# Altium PCB binbot_board_ver8.PcbDoc
Units mm, origin at the board's own origin, x right, y up, seen from the top; angles counter-clockwise.
Board outline 120.96 x 80.85 mm, 2 copper layers (Top Layer, Bottom Layer); 35 components, 0 nets, 183 pads, 50 vias.
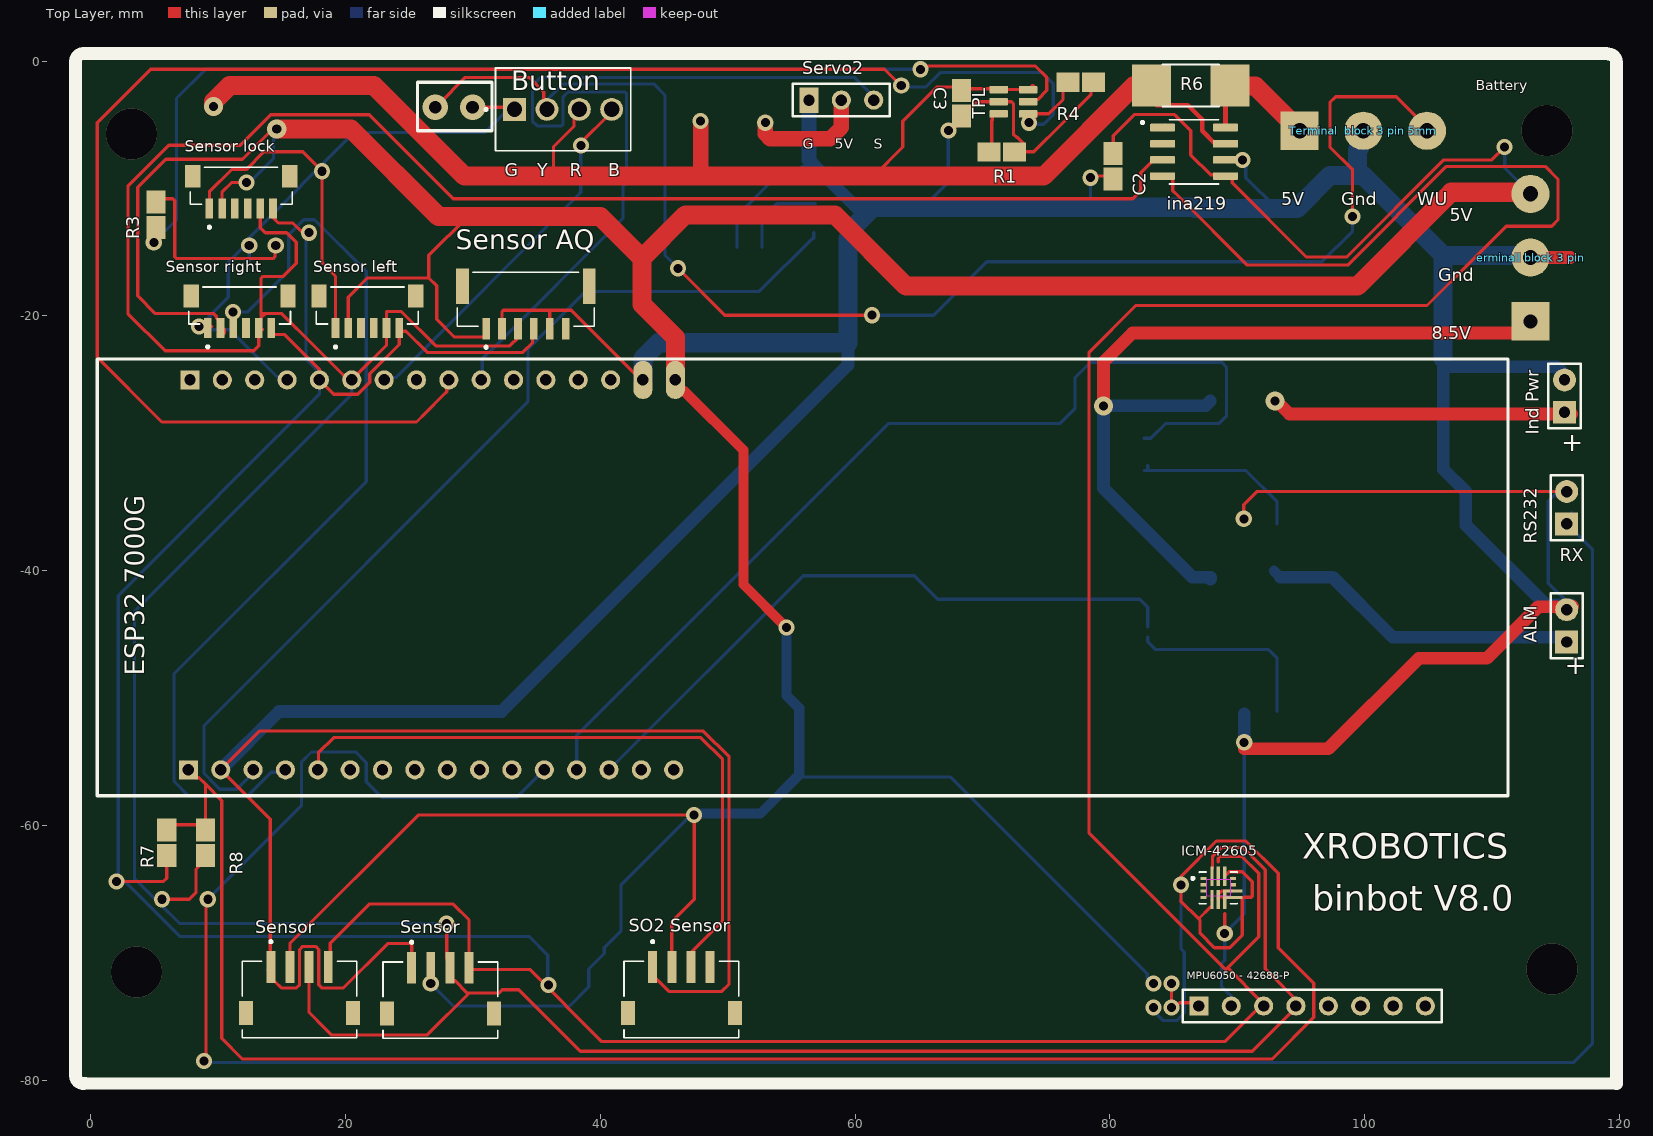
[diagram p0: Top Layer view]
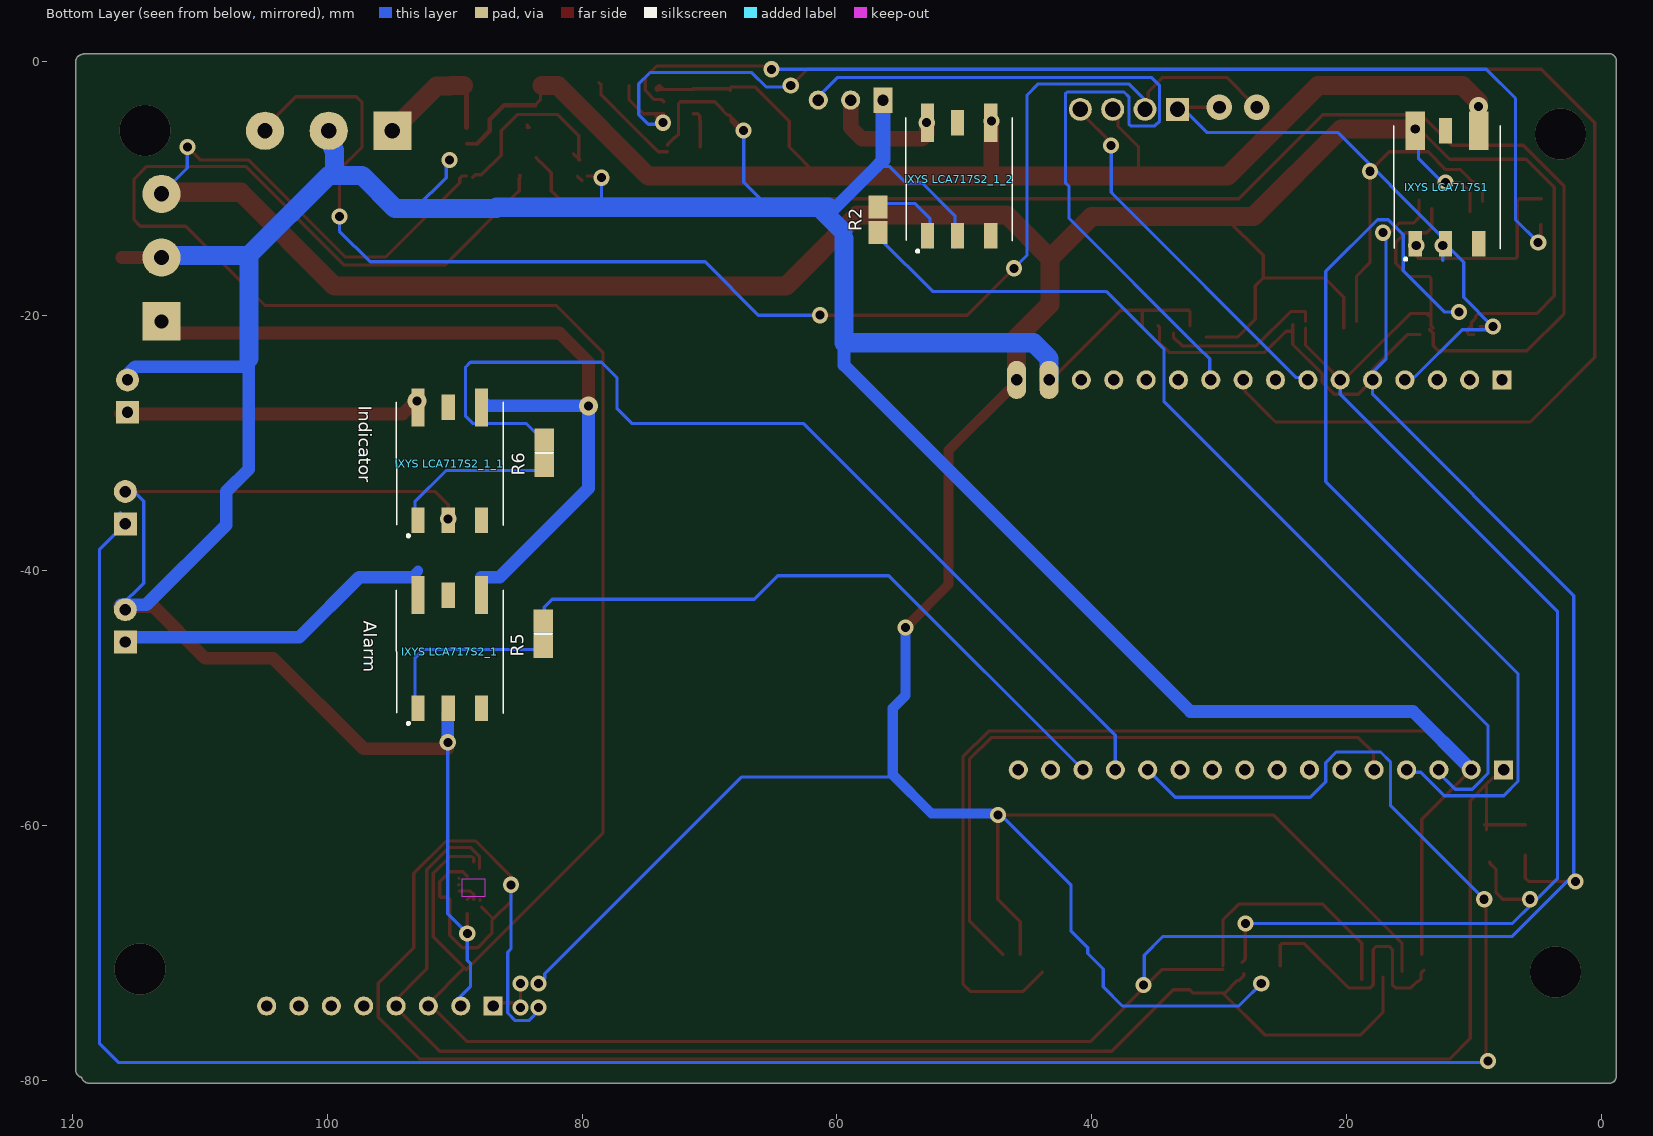
[diagram p1: Bottom Layer view, seen from below]

## Layer stack, top to bottom
Top Solder: solder mask 0.0102, Solder Resist, Dk 3.5
Top Layer: signal copper 0.0356
Dielectric 1: dielectric 0.32, FR-4, Dk 4.8
Bottom Layer: signal copper 0.0356
Bottom Solder: solder mask 0.0102, Solder Resist, Dk 3.5

## Board outline
-0.442,-80.229 cw(c-0.589,-79.647) -1.189,-79.647 -1.189,0 cw(c-0.589,0) -0.589,0.6 118.97,0.6 cw(c118.97,0) 119.231,0.541 cw(c119.172,-0.057) 119.773,-0.057 119.773,-79.175 cw(c119.172,-79.175) 119.304,-79.761 cw(c118.718,-79.629) 118.718,-80.229

## Design rules (kind name [scope] priority, off if disabled: settings)
Clearance [All] p1: gap=0.254 ignorepadtopadclearanceinfootprint=FALSE except(0: Arc-Hole Track-Hole SMDPad-Hole THPad-Hole Via-Hole Fill-Hole Poly-Hole Region-Hole Text-Hole)
PolygonConnect [All] p1: connectstyle=Relief reliefconductorwidth=0.254 reliefentries=4 polygonreliefangle="90 Angle" airgapwidth=0.254
RoutingVias [All] p1: holewidth=0.711 width=1.27 viastyle="Through Hole" minholewidth=0.711 minwidth=1.27 maxholewidth=0.711 maxwidth=1.27
SolderMaskExpansion [All] p1: expansion=0.102 istentingtop=FALSE
Width [All] p1: maxlimit=0.254 minlimit=0.254 preferedwidth=0.254
30 further rules are at their usual default settings.

## Components (designator, comment, footprint, x,y, rotation, side; value= is the part's Value field where it differs from the comment)
ALM "Comment" HDR1X2 115.697,-27.559 r90 top
Button "Terminal Block 4pin 2,5mm" TE_282834-4 37.084,-3.779 r0 top
C2 "100nF" 6-0805_M 80.264,-8.255 r90 top (schematic designator R2)
C3 "0.1μf" 6-0805_M 68.372,-3.302 r90 top
"erminall block 3 pin" "Terminall block 3 pin" TE_282836-3#1 113.03,-15.414 r90 top
"ESP32 7000G" "ESP32 7000G" HDR1X16#1 7.793,-25.019 r0 top
ICM-42605 "ICM-42605" XDCR_ICM-42605 88.519,-64.897 r0 top
ina219 "Comment" SOIC127P599X175-8N 86.614,-7.112 r0 top
"Ind Pwr" "Comment" HDR1X2 115.87,-45.593 r90 top
"IXYS LCA717S1" "IXYS LCA717S" *SON160P500X500X140-6N#1 12.111,-9.897 r90 bottom
"IXYS LCA717S2_1" "IXYS LCA717S" *SON160P500X500X140-6N#2 90.394,-46.346 r90 bottom
"IXYS LCA717S2_1_1" "IXYS LCA717S" *SON160P500X500X140-6N#2 90.394,-31.614 r90 bottom
"IXYS LCA717S2_1_2" "IXYS LCA717S" *SON160P500X500X140-6N#2 50.419,-9.271 r90 bottom
"MPU6050 - 42688-P" "Comment" HDR1X8 86.995,-74.168 r0 top
R1 "180K Ohms" 6-0805_M 71.525,-7.112 r0 top (schematic designator R3)
R2 "4.7K Ohms" 6-0805_M 56.769,-12.446 r90 bottom (schematic designator R3)
R3 "0.5K Ohms" 6-0805_M 5.126,-12.065 r90 top (schematic designator R2)
R4 "180K Ohms" 6-0805_M 77.724,-1.651 r0 top (schematic designator R2)
R5 "0.5K Ohms" 6-0805_M 83.058,-44.958 r90 bottom (schematic designator R3)
R6 "0.01ohm" RESC6331X70N 86.36,-1.905 r0 top
R6 "0.5K Ohms" 6-0805_M 82.977,-30.75 r90 bottom (schematic designator R3)
R7 "10K Ohms" 6-0805_M 5.969,-61.341 r90 top (schematic designator R2)
R8 "10K Ohms" 6-0805_M 9.017,-61.341 r90 top (schematic designator R2)
RS232 "Comment" HDR1X2 115.87,-36.322 r90 top
Sensor "Comment" JST_S4B-ZR-SM4A-TF(LF)(SN) 27.444,-71.161 r0 top
Sensor "Comment" JST_S4B-ZR-SM4A-TF(LF)(SN) 16.395,-71.12 r0 top
"Sensor AQ" "Comment" JST_BM06B-GHS-TBT(LF)(SN)(N) 34.163,-17.653 r180 top
"Sensor left" "TOF0120" JST_BM06B-SRSS-TB(LF)(SN) 21.717,-19.177 r0 top
"Sensor lock" "TOF050C" JST_BM06B-SRSS-TB(LF)(SN) 11.814,-9.782 r0 top
"Sensor right" "TOF0120" JST_BM06B-SRSS-TB(LF)(SN) 11.684,-19.177 r0 top
Servo2 "Comment" HDR1X3 56.388,-3.048 r0 top
"SO2 Sensor" "Comment" JST_S4B-ZR-SM4A-TF(LF)(SN) 46.367,-71.12 r0 top
"Terminal  block 3 pin 5mm" "Terminal 3 pin" TE_282836-3#2 99.902,-5.461 r0 top
TPL "TPL5110" SOT95P280X110-6N 72.436,-3.175 r0 top
? "Comment" HDR1X16#2 7.666,-55.626 r0 top

## Footprints (in the part's own frame and the unit in brackets; to place one, negate y for a bottom-side part, rotate by r counter-clockwise, add the part's x,y. Pads: shape width x height; smd on the part's side, far side on the other; paste and mask are expansions set on the pad)
6-0805_M [mm] "Chip Resistor, Body 2.0x1.2mm, IPC Low Density"
  rect 1.8x1.5 smd: 1(-1,0) 2(1,0)
  body extent -1.07,-0.7 1.07,0.7, height 0.7
*SON160P500X500X140-6N#1 [mm]
  rect 2x1.03 smd: 1(-4.436,2.489) 2(-4.436,0.127) 3(-4.436,-2.489) 5(4.436,0.127)
  rect 3x1.5 smd: 4(4.436,-2.489) 6(4.436,2.489)
  silkscreen extent -5.74,-4.19 4.83,4.19
*SON160P500X500X140-6N#2 [mm]
  rect 2x1.03 smd: 1(-4.436,2.489) 2(-4.436,0.127) 3(-4.436,-2.489) 5(4.436,0.127)
  rect 3x1.03 smd: 4(4.436,-2.489) 6(4.436,2.489)
  silkscreen extent -5.74,-4.19 4.83,4.19
HDR1X2 [mm] "Connector; Header; 2 Position"
  rect 1.8x1.8 hole 0.9: 1(0,0)
  round 1.8 hole 0.9: 2(2.54,0)
  silkscreen extent -1.27,-1.27 3.81,1.27
HDR1X3 [mm] "Connector; Header; 3 Position"
  rect 1.5x2 hole 0.9: 1(0,0)
  round 1.5 hole 0.9: 2(2.54,0) 3(5.08,0)
  silkscreen extent -1.27,-1.27 6.35,1.27
HDR1X8 [mm] "Connector; Header; 8 Position"
  rect 1.5x1.5 hole 0.9: 1(0,0)
  round 1.5 hole 0.9: 2(2.54,0) 3(5.08,0) 4(7.62,0) 5(10.16,0) 6(12.7,0) 7(15.24,0) 8(17.78,0)
  silkscreen extent -1.27,-1.27 19.05,1.27
HDR1X16#1 [mm] "Connector; Header; 16 Position"
  rect 1.5x1.5 hole 0.9: 1(0,0)
  round 1.5 hole 0.9: 2(2.54,0) 3(5.08,0) 4(7.62,0) 5(10.16,0) 6(12.7,0) 7(15.24,0) 8(17.78,0) 9(20.32,0) 10(22.86,0) 11(25.4,0) 12(27.94,0) 13(30.48,0) 14(33.02,0)
  oval 1.5x3 hole 0.9: 15(35.56,0) 16(38.1,0)
HDR1X16#2 [mm] "Connector; Header; 16 Position"
  rect 1.5x1.5 hole 0.9: 1(0,0)
  round 1.5 hole 0.9: 2(2.54,0) 3(5.08,0) 4(7.62,0) 5(10.16,0) 6(12.7,0) 7(15.24,0) 8(17.78,0) 9(20.32,0) 10(22.86,0) 11(25.4,0) 12(27.94,0) 13(30.48,0) 14(33.02,0) 15(35.56,0) 16(38.1,0)
JST_BM06B-GHS-TBT(LF)(SN)(N) [mm]
  rect 0.6x1.7 smd: 1(3.125,3.35) 2(1.875,3.35) 3(0.625,3.35) 4(-0.625,3.35) 5(-1.875,3.35) 6(-3.125,3.35)
  rect 1x2.8 smd: S1(-4.975,0) S2(4.975,0)
  silkscreen extent -5.38,-1.1 5.38,4.9, body extent -5.38,-2.12 5.38,2.83, height 4.15
JST_BM06B-SRSS-TB(LF)(SN) [mm]
  rect 0.6x1.55 smd: 1(-2.5,-1.775) 2(-1.5,-1.775) 3(-0.5,-1.775) 4(0.5,-1.775) 5(1.5,-1.775) 6(2.5,-1.775)
  rect 1.2x1.8 smd: S1(-3.8,0.75) S2(3.8,0.75)
  silkscreen extent -4,-3.35 4,1.45, body extent -4,-2.9 4,0.7, height 4.25
JST_S4B-ZR-SM4A-TF(LF)(SN) [mm]
  rect 0.7x2.5 smd: 1(-2.25,0) 2(-0.75,0) 3(0.75,0) 4(2.25,0)
  rect 1.1x1.9 smd: S1(-4.2,-3.6) S2(4.2,-3.6)
  silkscreen extent -4.5,-5.55 4.5,2.1
RESC6331X70N [mm]
  rect 3.06x3.32 smd: 1(-3.078,0) 2(3.078,0)
  silkscreen extent -2.23,-1.65 2.23,1.65
SOIC127P599X175-8N [mm]
  rrect25% 1.97x0.6 smd: 1(-2.47,1.905) 2(-2.47,0.635) 3(-2.47,-0.635) 4(-2.47,-1.905) 5(2.47,-1.905) 6(2.47,-0.635) 7(2.47,0.635) 8(2.47,1.905)
  silkscreen extent -4.14,-2.52 1.95,2.52, body extent -2.45,-3 2.45,3, height 1.75
SOT95P280X110-6N [mm]
  rrect25% 1.45x0.59 smd: 1(-1.155,0.95) 2(-1.155,0) 3(-1.155,-0.95) 4(1.155,-0.95) 5(1.155,0) 6(1.155,0.95)
TE_282834-4 [mm]
  rect 1.8x1.8 / inner round 1.8 / far side rect 1.8x1.8 hole 1.2: 1(-3.81,0)
  round 1.8 hole 1.2: 2(-1.27,0) 3(1.27,0) 4(3.81,0)
  silkscreen extent -6.16,-3.25 5.31,3.25, body extent -5.31,-3.25 5.31,3.25, height 10
TE_282836-3#1 [mm]
  rect 3x3 hole 1.1: 1(-5,0)
  round 3 hole 1.2: 2(0,0) 3(5,0)
TE_282836-3#2 [mm]
  rect 3x3 hole 1.2: 1(-5,0)
  round 3 hole 1.2: 2(0,0) 3(5,0)
XDCR_ICM-42605 [mm]
  rect 0.475x0.25 smd paste-1 mask+0.05: 1(-1.162,0.75) 2(-1.162,0.25) 3(-1.162,-0.25) 4(-1.162,-0.75) 10(1.162,0.25) 11(1.162,0.75)
  rect 0.25x1.5 smd paste-1 mask+0.05: 5(-0.5,-0.913) 6(0,-0.913) 7(0.5,-0.913) 12(0.5,0.913) 13(0,0.913) 14(-0.5,0.913)
  rect 1.5x0.25 smd paste-1 mask+0.05: 8(1.162,-0.75) 9(1.162,-0.25)
  Keep-Out Layer region: 0.925,-0.675 -0.925,-0.675 -0.925,0.675 0.925,0.675
  silkscreen extent -2.1,-1.25 1.5,1.25, body extent -1.5,-1.25 1.5,1.25, height 0.97

## Via types
v1: diameter 1.27, hole 0.711, Top Layer to Bottom Layer, 39 vias
v2: diameter 1.5, hole 0.711, Top Layer to Bottom Layer, 5 vias
v3: diameter 4, hole 4, Top Layer to Bottom Layer, 4 vias
v4: diameter 2, hole 1, Top Layer to Bottom Layer, 2 vias

## Nets (pads, with @x,y where several pads share a name; then routed paths per layer and width w, separated by ;. In a path a pad name is that pad's centre, name@x,y a point inside that pad or via, vN(x,y) a via of type N, cw(c..) or ccw(c..) an arc to the next point about the centre after c; other vN are vias at no path point)
pads on no net: "erminall block 3 pin.1" "erminall block 3 pin.2" "erminall block 3 pin.3" "ESP32 7000G.1" "ESP32 7000G.2" "ESP32 7000G.3" "ESP32 7000G.4" "ESP32 7000G.5" "ESP32 7000G.6" "ESP32 7000G.7" "ESP32 7000G.8" "ESP32 7000G.9" "ESP32 7000G.10" "ESP32 7000G.11" "ESP32 7000G.12" "ESP32 7000G.13" "ESP32 7000G.14" "ESP32 7000G.15" "ESP32 7000G.16" "Ind Pwr.1" "Ind Pwr.2" "IXYS LCA717S1.1" "IXYS LCA717S1.2" "IXYS LCA717S1.3" "IXYS LCA717S1.4" "IXYS LCA717S1.5" "IXYS LCA717S1.6" "IXYS LCA717S2_1.1" "IXYS LCA717S2_1.2" "IXYS LCA717S2_1.3" "IXYS LCA717S2_1.4" "IXYS LCA717S2_1.5" "IXYS LCA717S2_1.6" "IXYS LCA717S2_1_1.1" "IXYS LCA717S2_1_1.2" "IXYS LCA717S2_1_1.3" "IXYS LCA717S2_1_1.4" "IXYS LCA717S2_1_1.5" "IXYS LCA717S2_1_1.6" "IXYS LCA717S2_1_2.1" "IXYS LCA717S2_1_2.2" "IXYS LCA717S2_1_2.3" "IXYS LCA717S2_1_2.4" "IXYS LCA717S2_1_2.5" "IXYS LCA717S2_1_2.6" "MPU6050 - 42688-P.1" "MPU6050 - 42688-P.2" "MPU6050 - 42688-P.3" "MPU6050 - 42688-P.4" "MPU6050 - 42688-P.5" "MPU6050 - 42688-P.6" "MPU6050 - 42688-P.7" "MPU6050 - 42688-P.8" "Sensor AQ.1" "Sensor AQ.2" "Sensor AQ.3" "Sensor AQ.4" "Sensor AQ.5" "Sensor AQ.6" "Sensor AQ.S1" "Sensor AQ.S2" "Sensor left.1" "Sensor left.2" "Sensor left.3" "Sensor left.4" "Sensor left.5" "Sensor left.6" "Sensor left.S1" "Sensor left.S2" "Sensor lock.1" "Sensor lock.2" "Sensor lock.3" "Sensor lock.4" "Sensor lock.5" "Sensor lock.6" "Sensor lock.S1" "Sensor lock.S2" "Sensor right.1" "Sensor right.2" "Sensor right.3" "Sensor right.4" "Sensor right.5" "Sensor right.6" "Sensor right.S1" "Sensor right.S2" "SO2 Sensor.1" "SO2 Sensor.2" "SO2 Sensor.3" "SO2 Sensor.4" "SO2 Sensor.S1" "SO2 Sensor.S2" "Terminal  block 3 pin 5mm.1" "Terminal  block 3 pin 5mm.2" "Terminal  block 3 pin 5mm.3" ?.1 ?.2 ?.3 ?.4 ?.5 ?.6 ?.7 ?.8 ?.9 ?.10 ?.11 ?.12 ?.13 ?.14 ?.15 ?.16 ALM.1 ALM.2 Button.1 Button.2 Button.3 Button.4 C2.1 C2.2 C3.1 C3.2 ICM-42605.1 ICM-42605.2 ICM-42605.3 ICM-42605.4 ICM-42605.5 ICM-42605.6 ICM-42605.7 ICM-42605.8 ICM-42605.9 ICM-42605.10 ICM-42605.11 ICM-42605.12 ICM-42605.13 ICM-42605.14 ina219.1 ina219.2 ina219.3 ina219.4 ina219.5 ina219.6 ina219.7 ina219.8 R1.1 R1.2 R2.1 R2.2 R3.1 R3.2 R4.1 R4.2 R5.1 R5.2 R6.1 R6.2 R7.1 R7.2 R8.1 R8.2 RS232.1 RS232.2 Sensor.1 Sensor.2 Sensor.3 Sensor.4 Sensor.S1 Sensor.S2 Servo2.1 Servo2.2 Servo2.3 TPL.1 TPL.2 TPL.3 TPL.4 TPL.5 TPL.6
copper on no net: | length 3089.7
  Top Layer w0.254: v1(2.032,-64.389) 5.715,-64.389 5.969,-64.135 5.969,-62.341 ; 4.711,-10.795 6.455,-10.795 6.604,-10.944 6.604,-15.345 6.753,-15.494 14.314,-15.494 14.463,-15.345 14.463,-14.54 v1(14.524,-14.478) ; v1@4.745,-14.351 4.745,-12.827 ; v1(5.588,-65.786) 7.747,-65.786 8.255,-65.278 8.255,-63.453 8.763,-62.945 8.763,-62.865 ; 5.969,-59.944 9.144,-59.944 ; 7.239,-55.626 7.239,-54.991 ; v1(8.509,-20.828) 9.503,-20.828 ; v1(8.89,-78.486) 9.04,-78.336 9.04,-65.936 v1(9.19,-65.786) ; 9.017,-60.341 9.017,-59.944 9.017,-56.769 ; 9.314,-11.006 9.314,-10.244 11.049,-8.509 12.192,-8.509 13.589,-7.112 16.637,-7.112 v1(18.161,-8.636) 18.161,-15.835 19.217,-16.891 19.217,-20.407 ; 10.011,-21.46 10.394,-21.46 10.503,-21.351 10.503,-21.034 10.184,-20.715 10.184,-20.952 10.184,-20.477 9.865,-20.158 9.865,-20.019 9.658,-19.812 5.08,-19.812 3.683,-18.415 3.683,-15.956 3.683,-9.906 5.899,-7.69 11.912,-7.69 14.268,-5.334 v2(14.605,-5.334) ; 10.314,-11.811 10.314,-10.263 11.052,-9.525 v1(12.238,-9.525) ; v1(12.446,-14.478) v1@12.446,-14.219 ; 12.746,-55.626 12.954,-55.834 ; 13.184,-20.952 13.357,-20.779 13.357,-20.155 13.44,-20.072 13.647,-19.865 13.716,-19.796 ; 13.314,-11.557 13.314,-11.811 13.314,-13.06 13.716,-13.462 15.372,-13.462 16.129,-14.219 16.129,-15.875 15.113,-16.891 13.519,-16.891 13.37,-17.04 13.37,-20.003 13.577,-19.796 13.716,-19.796 ; 13.487,-21.048 13.184,-21.351 13.184,-22.352 12.801,-22.735 11.8,-22.735 5.845,-22.735 2.921,-19.812 2.921,-9.823 6.14,-6.604 11.736,-6.604 13.653,-4.687 14.137,-4.203 21.856,-4.203 28.448,-10.795 81.788,-10.795 82.423,-10.16 82.423,-8.763 83.266,-7.92 83.286,-7.92 83.61,-7.596 83.61,-7.576 ; 13.922,-71.348 14.145,-71.571 14.145,-71.93 14.145,-72.02 14.368,-72.243 14.458,-72.243 14.966,-72.751 16.153,-72.751 16.395,-72.509 16.395,-69.731 16.637,-69.489 17.653,-69.489 17.895,-69.731 17.895,-72.509 18.137,-72.751 19.843,-72.751 23.34,-69.254 25.045,-69.254 25.194,-69.403 25.194,-71.034 ; 14.097,-70.104 14.097,-59.517 10.206,-55.626 13.245,-52.587 48.099,-52.587 50.114,-54.603 50.114,-72.441 49.53,-73.025 45.387,-73.025 43.873,-71.511 ; 14.184,-21.463 15.24,-21.463 17.953,-24.176 17.953,-25.019 ; 14.314,-10.922 14.314,-12.282 14.732,-12.7 15.875,-12.7 v1@16.637,-13.462 ; 15.645,-71.445 15.645,-69.235 25.698,-59.182 v1(47.371,-59.182) 47.371,-65.786 45.611,-67.546 45.611,-70.104 ; 15.667,-55.626 15.667,-55.507 ; 17.145,-71.882 17.145,-72.898 17.145,-74.676 18.415,-75.946 18.923,-76.454 26.416,-76.454 26.416,-76.43 29.694,-73.152 ; 17.743,-24.808 19.084,-26.15 20.962,-26.15 21.902,-25.209 21.902,-24.551 24.217,-22.236 24.217,-20.952 ; 17.873,-55.758 17.873,-54.294 19.072,-53.095 47.888,-53.095 49.606,-54.813 49.606,-67.476 46.984,-70.098 ; 18.796,-72.075 18.796,-69.235 21.864,-66.167 28.448,-66.167 29.694,-67.413 29.694,-71.034 ; 20.193,-20.447 20.239,-20.401 ; 20.217,-20.952 20.217,-18.518 21.717,-17.018 26.543,-17.018 ; 23.217,-20.952 23.217,-22.295 20.493,-25.019 20.193,-25.019 19.454,-24.28 17.526,-22.352 14.97,-19.796 13.716,-19.796 ; 23.217,-20.423 23.217,-19.645 24.39,-19.645 27.097,-22.352 32.893,-22.352 33.592,-21.653 33.592,-21.336 ; 24.217,-20.661 24.217,-21.02 24.39,-21.193 24.749,-21.193 26.416,-22.86 33.909,-22.86 34.687,-22.082 34.687,-20.876 34.788,-20.775 ; v4@27.305,-3.365 29.4,-1.27 34.417,-1.27 35.56,-2.413 35.56,-3.779 ; v1@27.94,-67.945 27.94,-70.485 28.194,-70.739 ; 28.061,-71.64 28.061,-71.801 28.417,-72.157 28.579,-72.157 29.574,-73.152 32.048,-73.152 32.302,-72.898 33.614,-72.898 35.88,-75.164 38.44,-77.724 91.186,-77.724 94.615,-74.295 94.615,-73.914 ; 28.113,-25.019 27.948,-25.184 27.948,-25.946 27.617,-26.277 26.351,-27.543 25.573,-28.321 5.588,-28.321 0.508,-23.241 0.508,-4.826 4.699,-0.635 62.313,-0.635 63.583,-1.905 v1(63.627,-1.905) ; 29.464,-8.636 29.464,-8.382 ; 29.591,-12.192 26.543,-15.24 26.543,-17.018 ; 29.694,-71.3 34.47,-71.3 40.132,-76.962 43.942,-76.962 89.039,-76.962 92.081,-73.92 ; v4(29.972,-3.619) 32.956,-3.619 ; 31.038,-21.653 28.557,-21.653 27.16,-20.256 27.16,-17.635 26.543,-17.018 ; 32.288,-20.775 32.288,-19.655 32.385,-19.558 37.719,-19.558 43.18,-25.019 43.353,-25.019 43.353,-24.765 43.353,-24.606 ; 33.147,-25.019 33.147,-24.511 ; 36.038,-20.775 36.038,-19.558 ; 36.322,-9.017 36.322,-6.731 37.937,-5.116 37.937,-4.566 38.476,-4.027 ; v1(38.476,-6.604) 38.476,-6.401 40.767,-4.109 40.767,-3.779 ; 40.321,-24.781 40.492,-24.781 41.067,-25.356 41.067,-25.527 ; 45.318,-24.443 45.893,-25.019 ; v1(46.101,-16.256) 49.782,-19.937 55.37,-19.937 55.372,-19.939 v1@61.214,-19.939 ; 61.468,-9.017 63.754,-6.731 63.754,-4.699 66.421,-2.032 68.326,-2.032 ; v1@65.405,-0.381 74.168,-0.381 75.057,-1.27 75.057,-2.286 74.336,-3.007 73.759,-3.007 73.591,-3.175 ; v1@67.749,-5.284 68.301,-4.733 68.301,-4.374 ; 67.749,-4.953 68.372,-4.33 68.372,-4.302 ; 68.372,-2.302 68.372,-2.172 68.385,-2.159 71.311,-2.159 ; 68.426,-4.228 68.596,-4.228 68.995,-3.829 68.995,-3.776 69.596,-3.175 71.281,-3.175 72.287,-3.175 72.436,-3.324 72.436,-3.715 72.436,-5.731 72.686,-5.981 72.736,-5.981 73.309,-6.554 73.309,-6.604 ; 70.739,-6.719 70.739,-4.667 70.777,-4.629 70.777,-4.293 70.945,-4.125 71.281,-4.125 ; 71.281,-2.225 73.591,-2.225 ; 72.126,-76.962 72.15,-76.962 ; 73.309,-7.112 74.041,-7.112 76.327,-4.826 78.52,-2.633 78.52,-1.855 78.683,-1.692 ; 73.591,-4.125 74.021,-4.125 74.189,-4.293 74.189,-4.367 ; v1@73.66,-4.953 v1@73.82,-4.953 ; 73.806,-4.125 75.209,-4.125 76.327,-3.007 76.327,-1.905 ; 73.855,-2.225 73.591,-2.225 ; 73.911,-1.905 73.872,-1.944 73.82,-1.997 73.591,-2.225 ; v1(78.486,-9.144) 78.613,-9.017 79.629,-9.017 ; 80.01,-9.382 80.375,-9.017 ; 80.19,-7.747 80.688,-7.249 ; 80.264,-7.747 80.264,-7.382 ; 80.264,-7.255 80.264,-6.905 80.264,-5.842 81.915,-4.191 85.09,-4.191 86.36,-5.461 86.36,-7.366 87.912,-8.918 88.396,-8.918 88.59,-9.111 ; 83.282,-1.905 83.282,-3.035 83.685,-3.438 ; 84.317,-5.034 84.144,-5.207 84.328,-5.207 ; v1@84.836,-72.771 v1(84.836,-74.295) 85.111,-74.295 85.486,-73.92 86.735,-73.92 86.995,-73.66 ; 84.836,-9.017 84.93,-8.923 ; 84.874,-9.12 84.943,-9.19 84.943,-10.16 85.324,-10.541 90.785,-16.002 98.679,-16.002 106.426,-8.255 114.173,-8.255 115.189,-9.271 115.189,-12.446 114.681,-12.954 111.125,-12.954 109.667,-14.412 108.457,-15.622 104.902,-19.177 82.042,-19.177 78.371,-22.848 78.371,-60.591 89.103,-71.323 89.248,-71.179 ; 87.888,-66.417 87.659,-66.646 87.202,-67.103 86.973,-67.332 ; 88.019,-65.858 88.019,-65.81 ; 88.057,-63.361 88.057,-62.438 88.773,-61.722 90.436,-61.722 92.202,-63.488 92.202,-71.247 95.123,-74.168 ; 88.265,-6.477 89.084,-6.477 ; 88.519,-65.81 88.519,-65.401 88.773,-65.147 89.681,-65.147 ; 88.519,-65.605 88.815,-65.605 89.019,-65.81 ; 88.519,-62.861 88.519,-62.571 88.652,-62.438 90.378,-62.438 91.694,-63.754 91.694,-68.733 89.248,-71.179 ; v1(89.019,-68.473) 89.019,-66.933 ; 89.019,-63.984 89.376,-63.627 90.402,-63.627 90.551,-63.776 91.185,-64.41 91.185,-65.557 91.116,-65.626 90.551,-65.626 90.402,-65.775 90.402,-68.602 89.408,-69.596 88.212,-69.596 87.089,-68.473 87.089,-67.448 86.973,-67.332 ; 89.084,-9.017 89.443,-9.017 89.616,-9.19 89.616,-9.549 95.434,-15.367 98.596,-15.367 106.216,-7.747 109.982,-7.747 v1(110.998,-6.731) ; 89.084,-2.259 89.438,-1.905 ; 89.681,-64.647 89.687,-64.653 ; 89.681,-64.147 89.681,-64.139 ; v1(90.521,-35.923) 90.521,-34.798 90.539,-34.78 91.537,-33.782 100.241,-33.782 107.95,-33.782 115.697,-33.782 ; v1@90.551,-53.975 v1(90.551,-53.467) ; 92.075,-73.914 91.984,-73.914 89.248,-71.179 ; v1(99.06,-12.192) 99.06,-8.509 97.282,-6.731 97.282,-3.24 97.728,-2.794 102.489,-2.794 104.521,-4.826 ; 113.542,-15.621 113.538,-15.621 113.745,-15.414 ; 116.158,-15.414 116.205,-15.367 ; 8.289,-56.249 7.666,-55.626 8.289,-56.249 ; 8.289,-56.249 8.497,-56.249 ; 8.289,-56.249 8.497,-56.249 ; 8.497,-56.249 9.017,-56.769 ; 9.017,-56.769 10.287,-58.039 10.287,-72.315 10.287,-76.708 11.915,-78.336 37.128,-78.336 92.733,-78.336 96.012,-75.057 96.012,-72.39 93.218,-69.596 93.218,-63.754 90.678,-61.214 88.368,-61.214 85.598,-63.984 85.598,-65.913 85.576,-65.935 86.973,-67.332
  Top Layer w0.354: 83.685,-3.438 86.115,-3.438 87.249,-4.572 87.249,-5.461 88.265,-6.477 ; 89.084,-5.207 89.084,-2.259
  Top Layer w0.5: 73.96,-2.032 74.087,-2.159
  Top Layer w0.8: 45.893,-25.58 46.217,-25.903 46.604,-25.903 51.243,-30.542 51.243,-40.386 51.243,-41.083 v1(54.61,-44.45)
  Top Layer w1: v2(79.502,-27.051) 79.502,-23.622 81.788,-21.336 103.124,-21.336 112.108,-21.336 113.03,-20.414 ; v1@90.749,-53.975 90.551,-53.975 97.155,-53.975 104.267,-46.863 109.601,-46.863 113.635,-42.829 115.081,-42.829 115.151,-42.9 115.642,-42.9 115.743,-42.799 116.347,-42.799 ; v2(92.964,-26.67) 93.099,-26.67 94.115,-27.686 116.251,-27.686 ; 113.745,-15.414 116.158,-15.414
  Top Layer w1.2: 47.879,-9.017 v1(47.879,-4.695) ; v1(52.959,-4.826) 52.959,-5.715 53.34,-6.096 58.039,-6.096 58.928,-5.207 58.928,-3.175
  Top Layer w1.5: v2(9.652,-3.556) 9.652,-3.165 10.912,-1.905 22.225,-1.905 29.337,-9.017 36.322,-9.017 41.348,-9.017 48.006,-9.017 61.468,-9.017 74.803,-9.017 81.903,-1.917 83.143,-1.917 83.155,-1.905 ; v2(14.605,-5.334) 20.447,-5.334 27.305,-12.192 29.591,-12.192 40.005,-12.192 43.28,-15.467 ; 45.893,-25.019 45.893,-21.69 43.28,-19.077 43.28,-15.467 ; 89.311,-1.905 90.297,-1.905 90.336,-1.944 91.432,-1.944 94.152,-4.664 94.152,-4.711 94.417,-4.977 94.464,-4.977 ; 113.538,-10.287 106.807,-10.287 99.441,-17.653 88.138,-17.653 64.008,-17.653 58.42,-12.065 46.682,-12.065 43.28,-15.467
  Bottom Layer w0.254: v1(4.953,-14.224) 6.731,-12.446 6.731,-5.703 ; 6.731,-5.641 6.731,-2.921 9.017,-0.635 v1(65.151,-0.635) ; v1(8.509,-20.828) 10.795,-18.542 10.795,-15.776 11.981,-14.591 v1@12.238,-14.333 ; v1@8.636,-21.082 10.922,-21.082 14.621,-24.781 15.175,-24.781 15.413,-25.019 ; v1(8.89,-78.486) 9.017,-78.613 116.378,-78.613 117.902,-77.089 117.902,-38.354 116.643,-37.095 115.87,-36.322 ; v1(9.19,-65.786) 16.556,-58.42 16.556,-56.336 16.556,-55.003 17.33,-54.229 20.801,-54.229 21.636,-55.064 21.636,-56.561 22.86,-57.785 33.447,-57.785 35.606,-55.626 ; v1(11.176,-19.685) 12.302,-19.685 12.319,-19.668 15.54,-16.447 15.54,-13.63 16.724,-12.446 17.566,-12.446 21.624,-16.504 21.624,-32.998 6.535,-48.087 6.535,-56.534 7.659,-57.658 12.314,-57.658 14.155,-55.816 15.096,-55.816 15.286,-55.626 ; 12.446,-15.621 v1(12.446,-14.478) 12.446,-13.843 20.701,-5.588 30.988,-5.588 32.436,-4.14 32.478,-4.14 33.063,-3.555 33.4,-3.555 33.401,-3.556 ; v1@12.446,-9.525 14.351,-7.62 v2@14.351,-5.461 ; 13.061,-55.565 11.476,-57.15 10.131,-57.15 9.738,-56.757 8.89,-55.909 8.89,-52.165 34.324,-26.73 34.324,-22.615 38.873,-18.067 52.498,-18.067 56.64,-13.925 56.769,-13.925 56.769,-13.446 ; v1(17.145,-13.462) 16.891,-13.716 16.891,-23.368 17.953,-24.43 17.953,-24.892 17.953,-25.019 17.953,-26.159 2.159,-41.954 2.159,-63.881 6.985,-68.707 34.403,-68.707 35.88,-70.184 v1@35.88,-72.71 ; 17.826,-24.892 18.207,-24.511 ; 18.207,-55.626 18.398,-55.816 ; 20.366,-55.626 20.382,-55.642 ; 20.493,-25.572 20.493,-26.159 3.429,-43.224 3.429,-64.135 5.461,-66.167 6.985,-67.691 19.929,-67.691 v1@27.813,-67.691 ; 20.493,-25.145 20.493,-25.019 ; 23.033,-25.019 23.221,-24.831 23.937,-24.831 38.227,-10.541 38.476,-10.292 v1(38.476,-6.604) ; v1@26.416,-72.136 28.448,-74.168 37.592,-74.168 39.098,-72.662 39.098,-71.265 40.314,-70.049 40.314,-69.581 41.632,-68.263 41.632,-64.646 47.096,-59.182 v1(47.371,-59.182) ; 30.734,-24.905 30.734,-23.368 31.623,-22.479 41.783,-12.319 41.783,-9.816 42.063,-9.536 42.063,-5.091 42.063,-2.562 41.915,-2.413 37.465,-2.413 37.084,-2.794 37.084,-4.931 36.935,-5.08 35.052,-5.08 34.671,-4.699 34.671,-1.927 34.82,-1.778 35.328,-1.27 59.944,-1.27 61.113,-2.439 61.113,-2.483 61.468,-2.838 61.468,-3.175 ; 35.433,-3.429 37.084,-1.778 44.196,-1.778 45.085,-2.667 45.085,-15.24 v1(46.101,-16.256) ; 38.146,-55.626 38.146,-52.913 62.611,-28.448 76.073,-28.448 77.279,-27.241 77.279,-24.828 78.486,-23.622 80.899,-23.622 88.773,-23.622 89.154,-24.003 89.154,-27.863 88.569,-28.448 84.374,-28.448 83.231,-29.591 82.677,-29.591 ; 40.686,-55.626 55.926,-40.386 64.643,-40.386 66.496,-42.239 82.354,-42.239 82.977,-42.862 82.977,-43.012 82.977,-44.39 ; 43.226,-55.626 43.371,-55.77 ; 43.353,-25.019 43.353,-24.565 ; 50.741,-14.605 50.741,-12.124 53.325,-9.54 54.595,-9.54 55.88,-8.255 56.388,-8.255 ; 52.705,-14.605 52.705,-12.319 53.848,-11.176 56.896,-11.176 ; 55.433,-56.2 67.503,-56.2 82.948,-71.645 82.948,-72.005 83.439,-72.496 v1@83.439,-72.771 ; v1@61.214,-19.939 66.167,-19.939 70.358,-15.748 96.647,-15.748 99.06,-13.335 v1(99.06,-12.192) ; v1(63.627,-1.905) 63.754,-2.032 64.77,-2.032 65.532,-2.032 66.675,-0.889 74.676,-0.889 75.565,-1.778 75.565,-4.191 74.803,-4.953 v1@74.168,-4.953 ; 65.37,-11.465 67.327,-9.508 v1(67.327,-5.432) ; v1(78.486,-9.144) 78.486,-10.979 78.683,-11.176 ; 82.677,-32.131 90.678,-32.131 93.137,-34.59 93.137,-36.322 ; 82.977,-45.212 82.977,-45.562 83.6,-46.185 92.459,-46.185 92.502,-46.228 93.137,-46.863 93.137,-51.054 ; 82.977,-32.1 82.977,-31.75 ; v1@83.312,-74.422 84.201,-75.311 85.257,-75.311 85.852,-74.716 85.852,-69.949 85.598,-69.695 v1(85.598,-64.653) ; 89.98,-73.85 88.773,-72.644 88.773,-70.819 89.019,-70.573 v1(89.019,-68.473) 90.551,-66.941 v1(90.551,-53.467) ; 90.48,-51.181 90.551,-51.252 ; v1@90.678,-8.001 90.678,-9.144 93.091,-11.557 ; v1(110.998,-6.731) 110.998,-8.382 113.03,-10.414 ; 115.951,-33.02 114.427,-34.544 114.427,-40.975 116.292,-42.839 ; 116.251,-35.433 116.505,-35.687
  Bottom Layer w0.8: v1(47.371,-59.182) 47.461,-59.092 47.867,-59.092 47.904,-59.055 49.606,-59.055 52.578,-59.055 55.626,-56.007 55.626,-54.705 55.626,-52.102 55.626,-50.8 54.61,-49.784 v1(54.61,-44.45) ; 92.883,-40.005 93.391,-40.513
  Bottom Layer w1: 10.206,-55.626 14.778,-51.054 32.258,-51.054 59.453,-23.859 59.453,-22.098 ; 56.388,-7.747 56.642,-8.001 56.896,-8.255 60.389,-11.747 ; 87.89,-26.678 87.517,-27.051 v2(79.502,-27.051) 79.502,-33.528 86.476,-40.502 87.89,-40.502 87.905,-40.517 87.905,-40.648 ; v1(90.551,-53.467) 90.551,-51.252 ; 93.391,-40.513 97.506,-40.513 102.205,-45.212 115.362,-45.212 115.743,-45.593 ; 106.172,-23.344 106.172,-23.98 ; 115.911,-24.805 115.085,-23.98 106.172,-23.98 ; 116.205,-42.672 114.219,-42.672 107.95,-36.403 107.95,-33.782 106.172,-32.004 106.172,-23.98
  Bottom Layer w1.2: 56.388,-7.747 56.388,-3.302
  Bottom Layer w1.5: 43.353,-25.019 43.353,-23.322 44.577,-22.098 59.182,-22.098 ; 59.453,-22.098 59.453,-13.925 ; 59.517,-13.381 61.052,-11.846 61.433,-11.465 ; 60.671,-11.465 61.433,-11.465 ; 86.741,-11.557 93.091,-11.557 94.695,-11.557 97.281,-8.971 99.441,-8.971 99.441,-6.983 99.615,-6.809 99.615,-5.748 99.902,-5.461 ; 86.741,-11.465 84.28,-11.465 78.683,-11.465 65.37,-11.465 61.433,-11.465 ; 99.902,-8.971 106.172,-15.241 ; 106.172,-23.344 106.172,-15.241 ; 113.03,-15.414 112.857,-15.241 106.172,-15.241
  other v1: 83.439,-74.295 35.941,-72.517 26.694,-72.39 83.439,-72.39 84.836,-72.39 27.94,-67.691 61.341,-19.939 17.145,-13.462 90.424,-7.747 73.66,-4.826
  other v2: 79.502,-27.051
  other v3: 3.602,-71.501 114.727,-71.247 3.198,-5.703 114.323,-5.449
  other v4: 27.051,-3.619

## Silkscreen, mask and mechanical layers (free items; w line width, h text height)
Top Overlay:
  lines w0.254: 30.607,-1.651 31.242,-1.651 ; 0.508,-57.658 110.109,-57.658 111.252,-57.658 111.252,-23.368 0.508,-23.368 0.508,-57.658 ; 25.654,-5.461 31.496,-5.461 31.496,-1.651 25.654,-1.651 25.654,-5.461
  lines w1: 119.773,-80.264 -0.442,-80.229 cw(c-0.589,-79.647) -1.189,-79.647 -1.189,0 cw(c-0.589,0) -0.589,0.6 118.97,0.6 cw(c118.97,0) 119.231,0.541 cw(c119.172,-0.057) 119.773,-0.057 119.773,-80.137
  text "Battery" at 108.712,-2.273 h0.8
  text "G" at 55.88,-6.858 h0.8
  text "5V" at 58.42,-6.858 h0.8
  text "S" at 61.468,-6.858 h0.8
  text "G" at 32.512,-9.017 h1
  text "Y" at 35.052,-9.017 h1
  text "R" at 37.592,-9.017 h1
  text "B" at 40.64,-9.017 h1
  text "5V" at 93.453,-11.303 h1
  text "Gnd" at 98.171,-11.303 h1
  text "WU" at 104.14,-11.303 h1
  text "5V" at 106.68,-12.573 h1
  text "Gnd" at 105.791,-17.272 h1
  text "8.5V" at 105.283,-21.844 h1
  text "+" at 115.443,-30.607 h1.52
  text "RX" at 115.316,-39.243 h1
  text "+" at 115.697,-48.133 h1.52
  text "XROBOTICS" at 95.123,-62.611 h2
  text "binbot V8.0" at 95.885,-66.675 h2
Bottom Overlay:
  text "Indicator" at 97.536,-27.051 h1 r90
  text "Alarm" at 97.155,-43.942 h1 r90